# EAGLE board PCB_heatedbed_Mk2a_WITH_MOSFET (EAGLE 6.1)
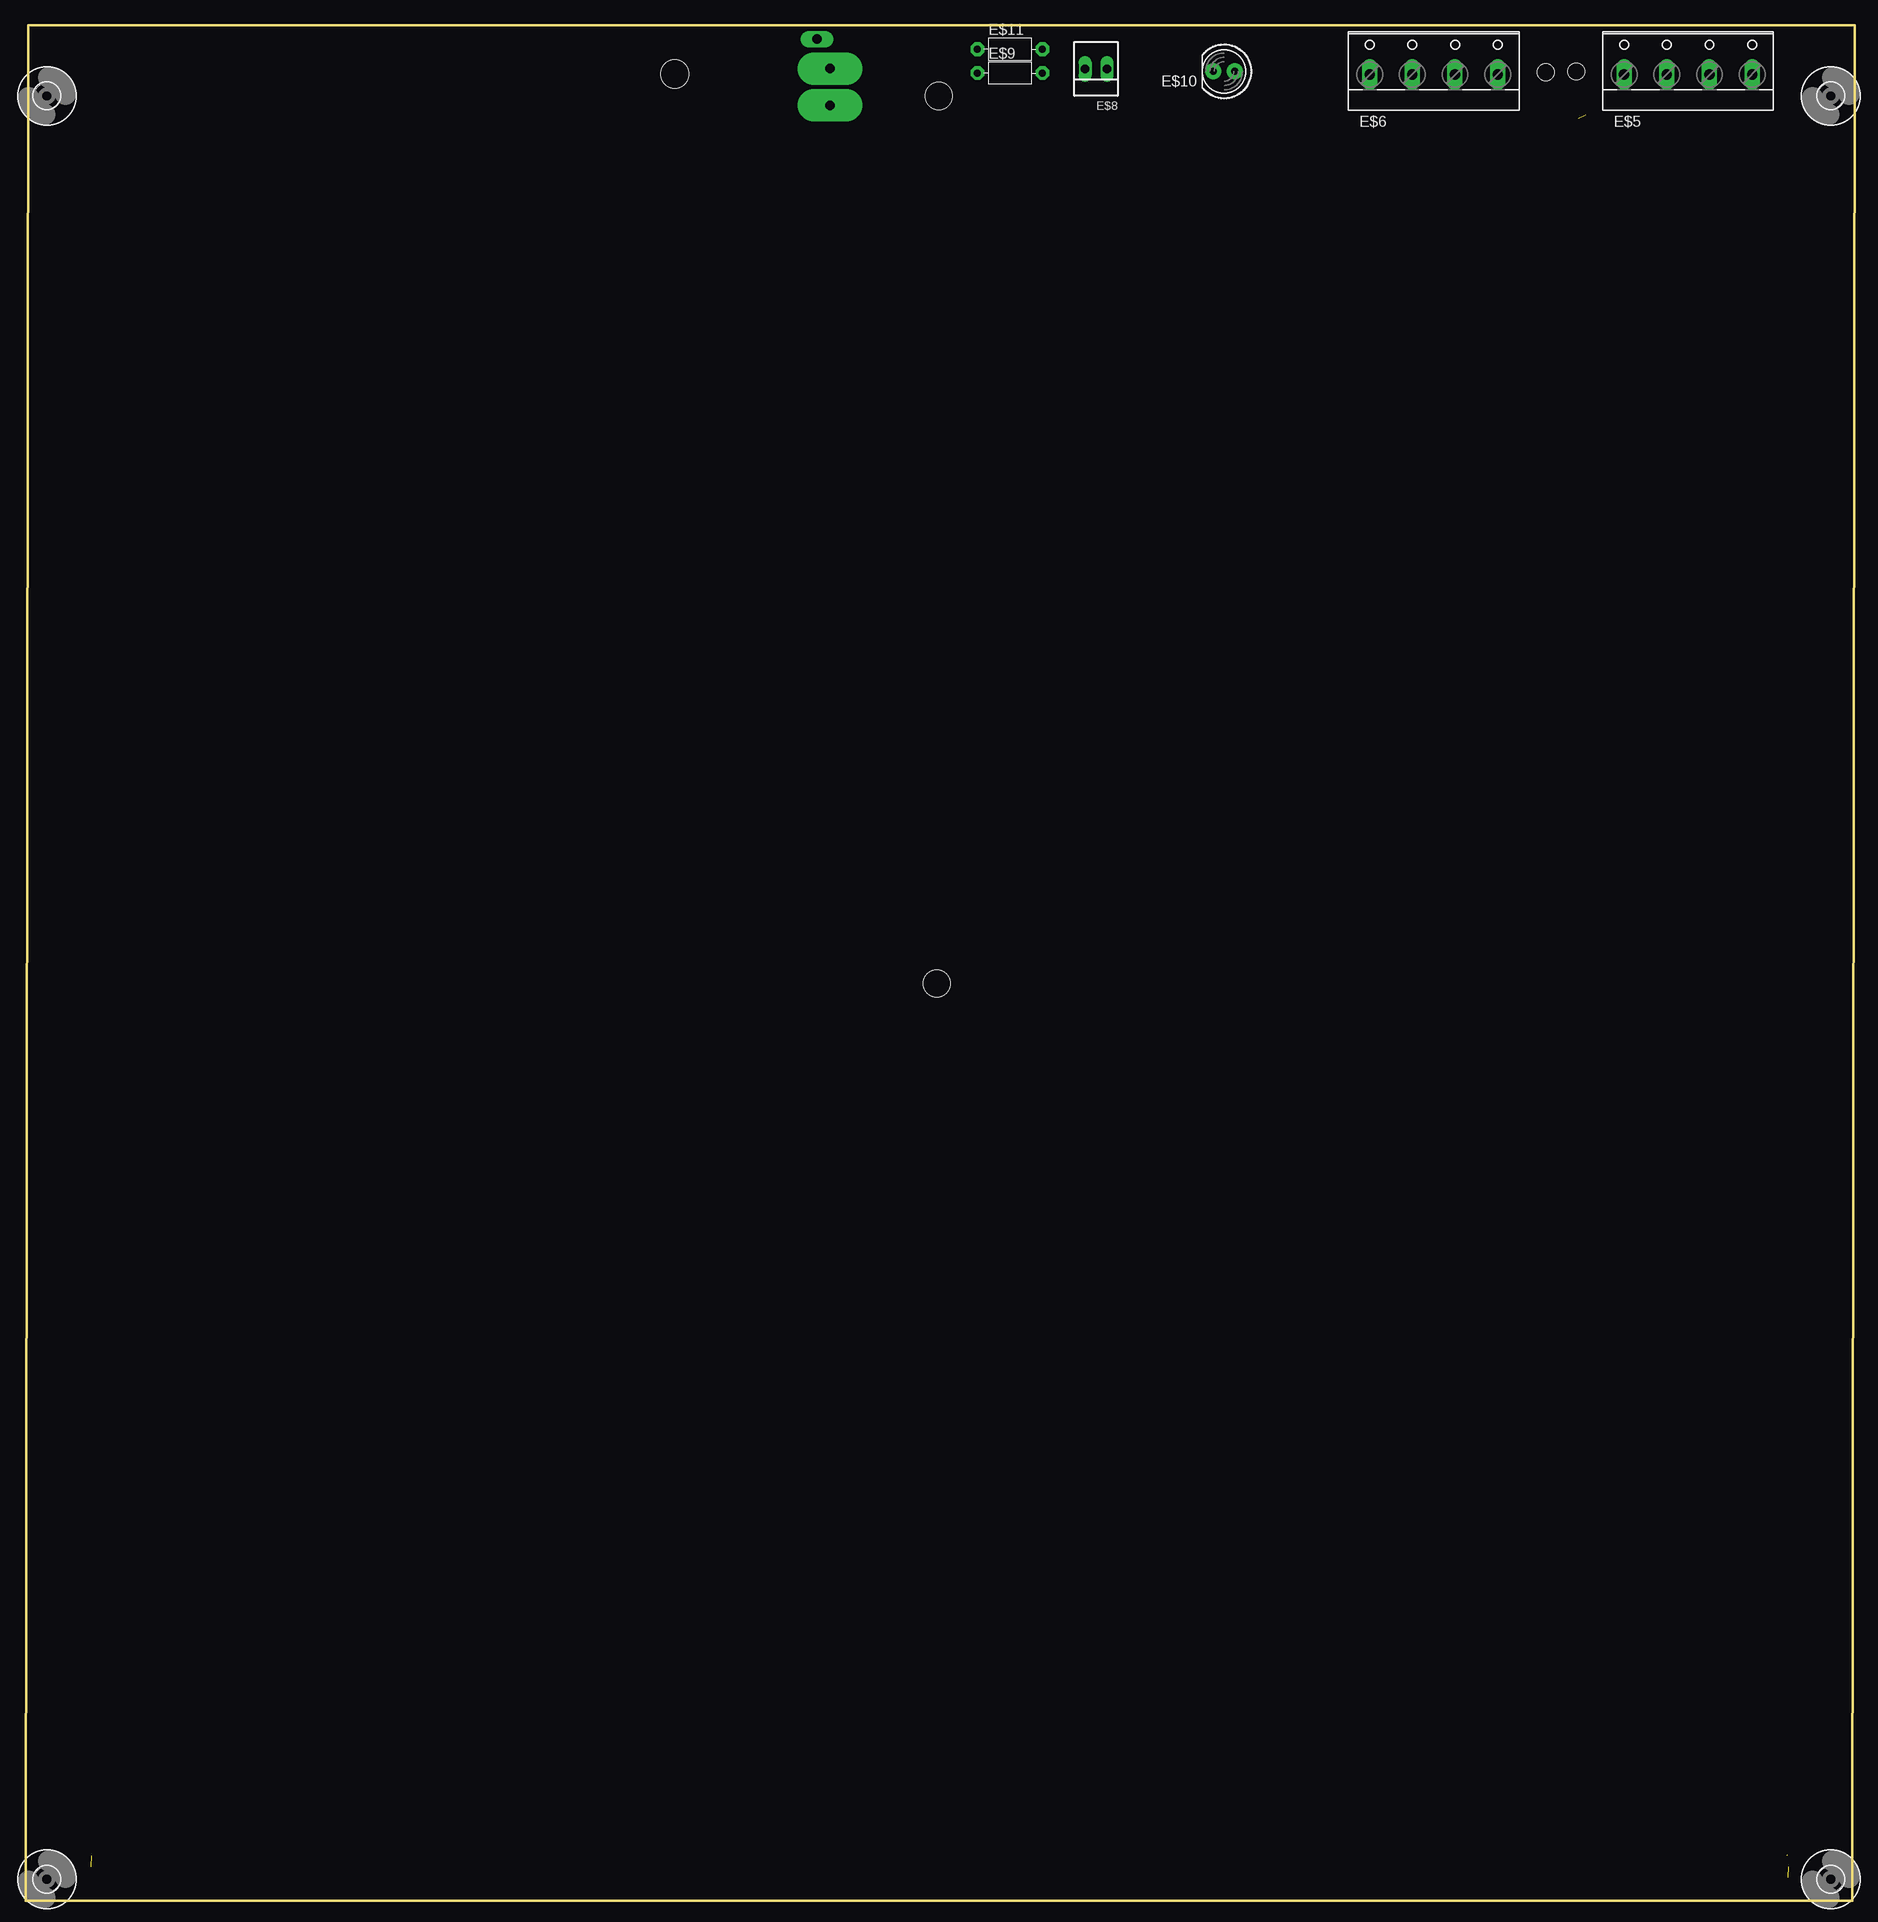
[diagram p0: board, top side]
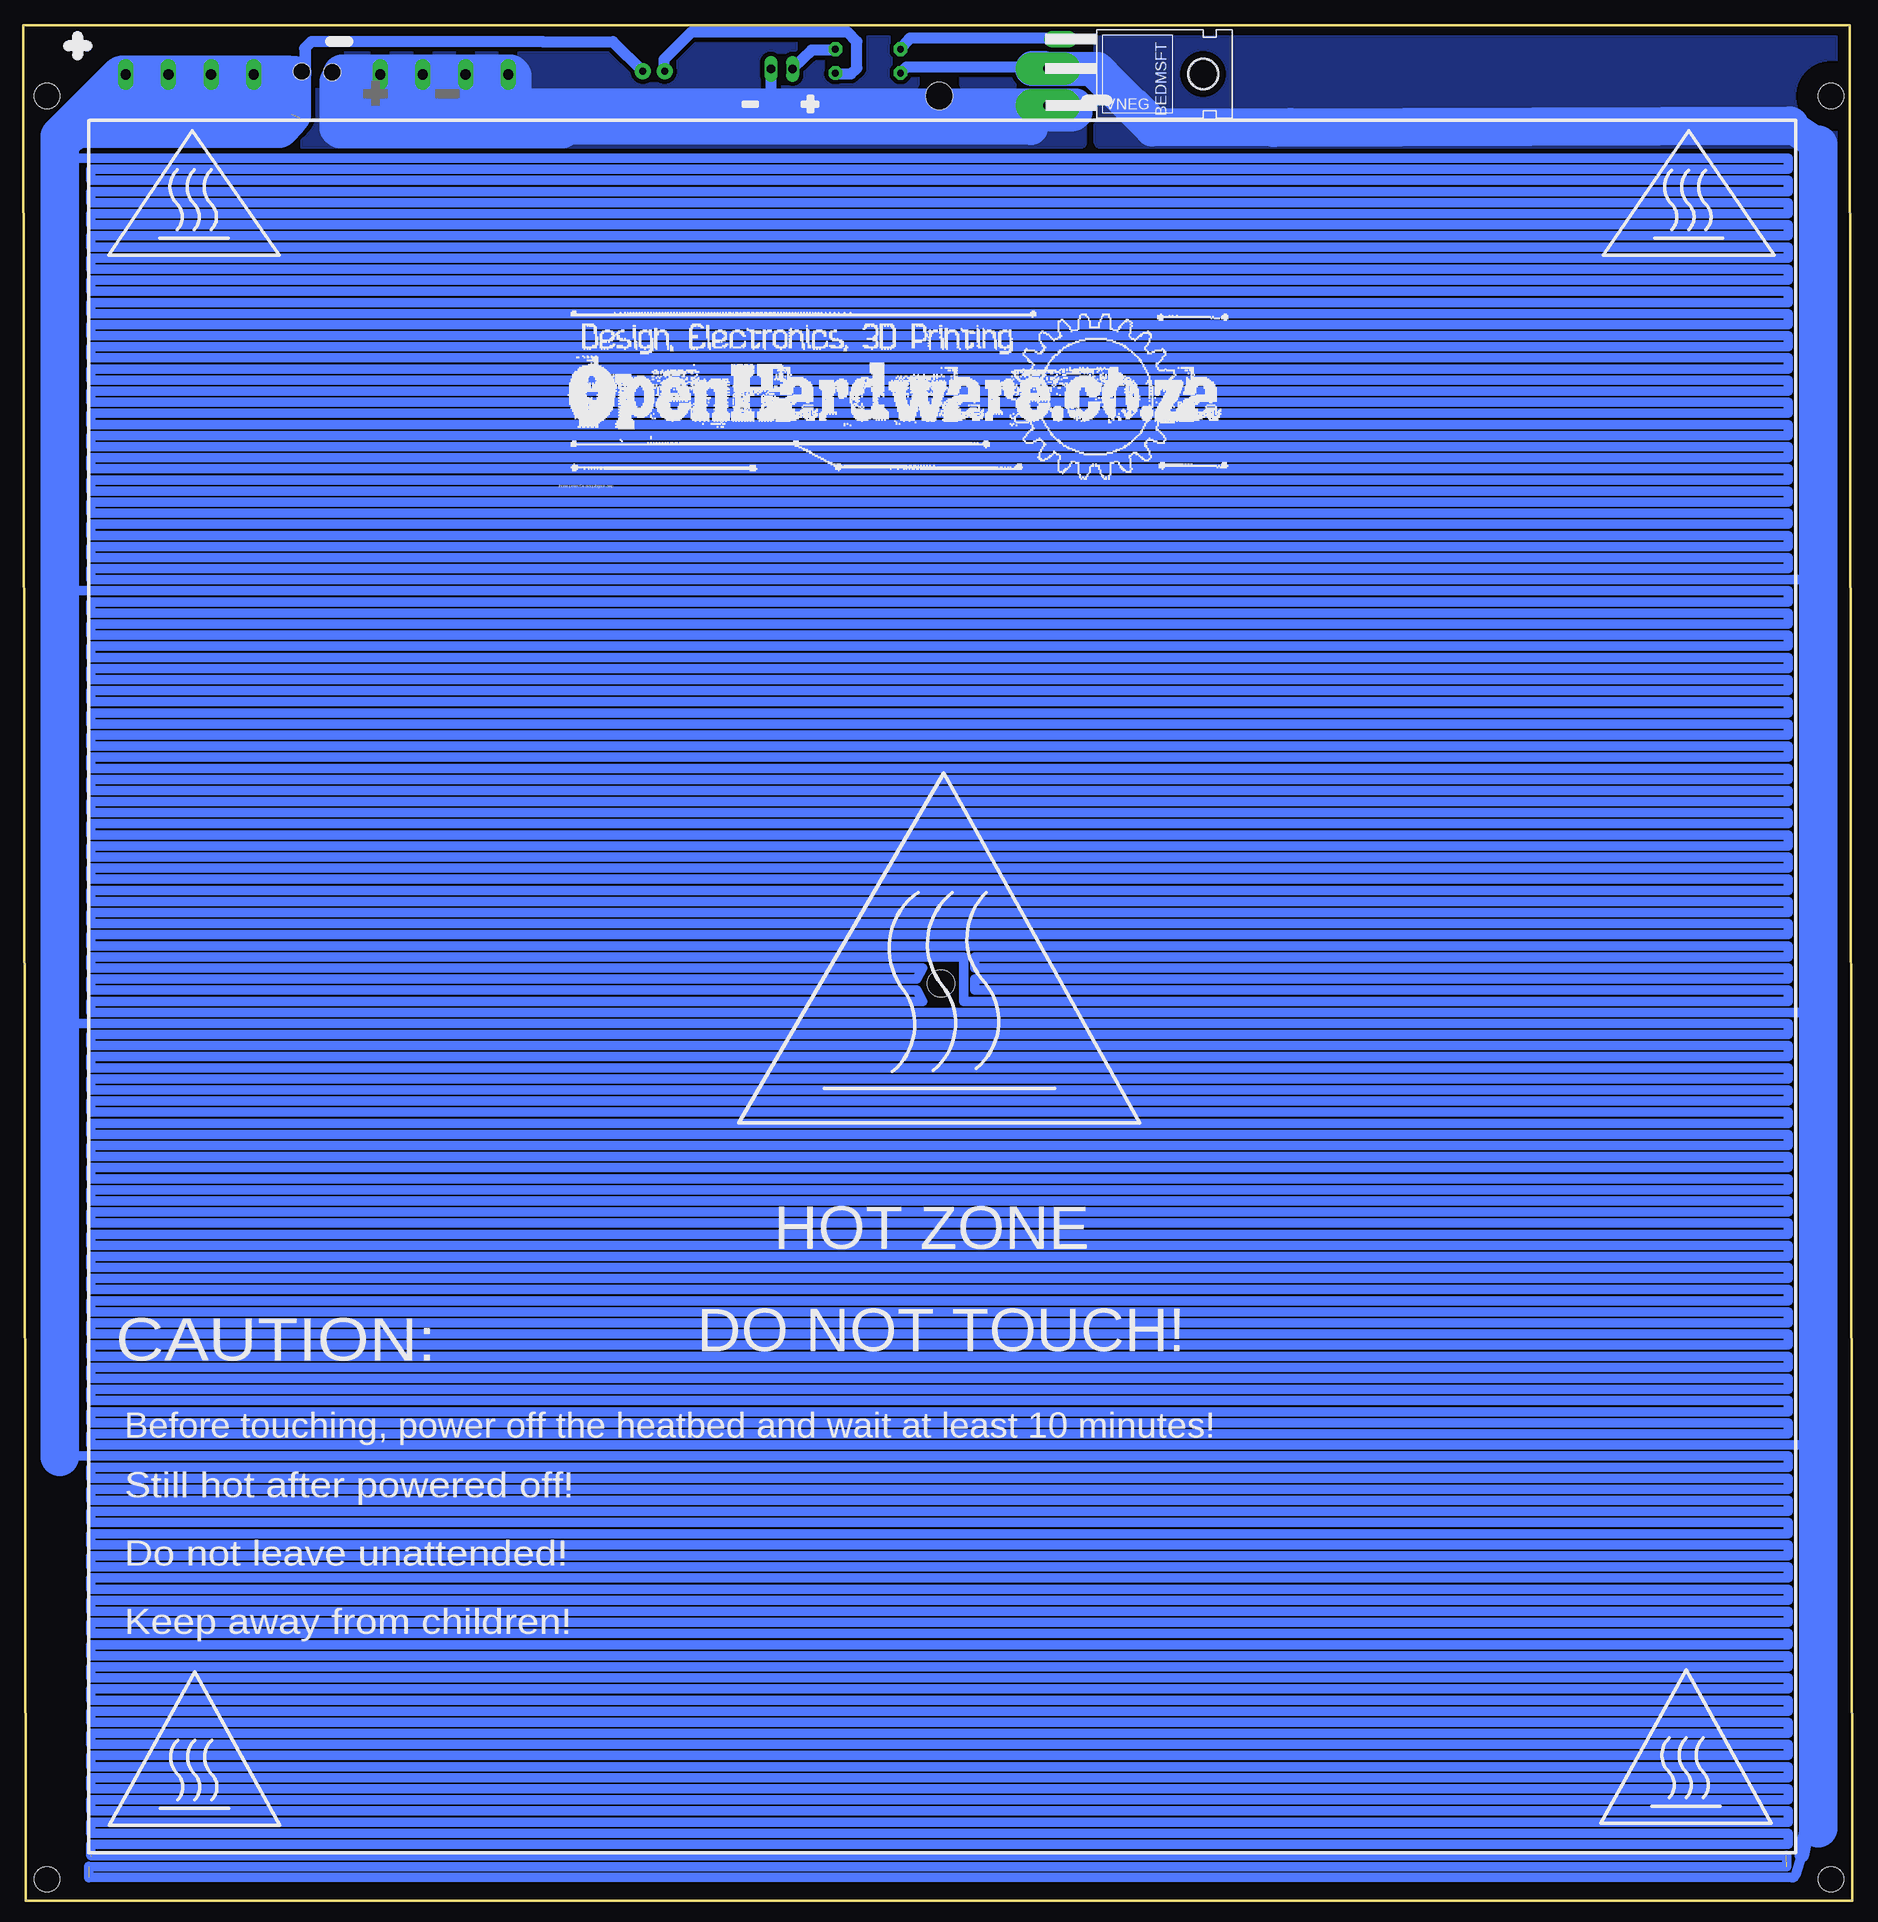
[diagram p1: board, bottom side, seen from below]

Size 214.3 x 219.8 mm. Coordinates in mm from the lower left corner, seen from the top.
Outline: 213.96,0.07 213.99,0.07
Outline: 214.3,219.8 0.3,219.8 0,0 214,0 214.3,219.8
Copper layers (1*16): Top 0.035mm / dielectric 1.5mm / Bottom 0.035mm
Design rules: minimum track width 10mil, minimum drill 24mil, track to track 20mil, track to pad 20mil, pad to pad 20mil, via to via 20mil, smd to smd 20mil, copper to edge 40mil, drill to drill 8mil, minimum pad ring 10mil, minimum via ring 8mil, stop-mask expansion 4mil, vias tented up to drill 0mil, thermal gap 10mil
Holes 3.2 mm at 106.97,211.5 106.77,107.5
Holes 2 mm at 181.68,214.37 178.11,214.27

## Footprints (pad centres in the part's own frame; a part is rotated, then mirrored left to right if it is on the bottom)
3,0 = hole 3: 0,0
W237-4 = drill 1.194 long: 1 -7.5,-1.27; 2 -2.5,-1.27; 3 2.5,-1.27; 4 7.5,-1.27
TO220CLH = drill 1.118 pad 3.81 long: A -0.635,-7.017; G 3.683,-7.017 | drill 1.118 pad 1.93 long: C -4.096,-5.524 | hole 3.302: 0,11.176
22-23-2021 = drill 1 long: 1 -1.27,0; 2 1.27,0
R-7,5 = drill 0.813 pad 1.6 octagon: 1 -3.81,0; 2 3.81,0
LED5MM = drill 0.813 pad 1.88: A -1.27,0; K 1.27,0

## Placement (x,y rotation side)
E$1  [3,0]  2.5,211.5 180 top
E$2  [3,0]  211.5,211.5 180 top
E$3  [3,0]  211.5,2.5 180 top
E$4  [3,0]  2.5,2.5 180 top
E$5  [W237-4]  194.79,215.29 0 top
E$6  [W237-4]  164.98,215.29 0 top
E$7  [TO220CLH]  87.22,214.08 270 bottom
E$8  [22-23-2021]  125.42,214.68 180 top
E$9  [R-7,5]  115.32,214.18 0 top
E$10  [LED5MM]  140.42,214.38 180 top
E$11  [R-7,5]  115.32,216.98 0 top

## Library data of the parts
E$1-E$4 = holes
E$5 E$6 = con-wago-500
E$7 = triac_OPENHW
E$8 = con-molex
E$9 E$11 = discrete
E$10 = SparkFun-LED

## Tracks (layer width: path | path; a pad name or v marks a point on that pad's centre or on a via)
12V  (1 unrouted)
  Bottom 1.27: 181.92,208.88 181.92,210.58 181.22,211.28 181.22,217.18 180.62,217.78 | 153.42,217.88 153.52,217.88 | 153.52,217.88 180.52,217.88 180.62,217.78 | 180.62,217.78 181.32,217.08 | 180.62,217.78 181.32,217.08 | 181.32,217.08 181.32,211.68 181.72,211.28 | 153.52,217.88 145.22,217.88 141.72,214.38
  Bottom 4.5: 204.72,208.38 205.22,208.38 205.92,207.68 202.22,207.68 | 202.22,207.68 184.42,207.68 | 184.42,207.68 184.32,207.68 183.22,208.78 183.22,211.98 183.32,211.98 184.42,210.88 201.02,210.88 201.42,210.48 201.42,208.48 202.22,207.68 | 202.22,207.68 208.32,207.68 210.02,205.98 210.02,206.78 202.92,213.88 182.92,213.88 182.82,213.78 182.82,209.28 184.42,207.68
GND
  Bottom 4: 91.12,210.38 93.72,210.38 | 93.72,210.38 96.12,210.38 96.22,210.28 96.22,209.58 | 96.22,209.58 96.22,209.48 96.12,209.38 91.22,209.38 91.02,209.58 91.02,210.38 93.72,210.38 | 93.72,210.38 94.12,210.38 94.52,209.98 95.82,209.98 96.22,209.58 | 96.22,209.58 96.22,207.78 176.22,207.78 177.62,207.68 | 92.32,210.18 93.52,210.18 93.72,210.38 | 93.72,210.38 156.32,210.38 157.32,211.38
  Bottom 4.5: 151.22,207.58 158.32,207.58 159.12,208.38 159.12,213.48 159.72,214.08 176.42,214.08 | 176.42,214.08 176.92,214.08 176.92,207.88 177.12,207.68 151.32,207.68 151.22,207.58 | 151.22,207.58 177.12,207.58 177.32,207.78 177.32,213.18 176.42,214.08 | 176.42,214.08 157.22,214.08 157.02,213.88 157.02,210.68 155.42,209.08 141.62,209.08 140.82,208.28 159.32,208.28 161.42,210.38 173.52,210.38 173.82,210.08
  pour Bottom: 90.32,205.98 211.62,205.98 211.62,219.08 90.32,219.08
S$1
  Bottom 4: 182.52,214.18 202.82,214.18 202.92,214.18
S$3
  Bottom 1.1: 207.7,204.2 7.5,204.2 7.5,202.9 206.4,202.9 206.4,201.6 7.5,201.6 7.5,200.3 206.4,200.3 206.4,199 7.5,199 7.5,197.7 206.4,197.7 206.4,196.4 7.5,196.4 7.5,195.1 206.4,195.1 206.4,193.8 7.5,193.8 7.5,192.5 206.4,192.5 206.4,191.2 7.5,191.2 7.5,189.9 206.4,189.9 206.4,188.6 7.5,188.6 7.5,187.3 206.4,187.3 206.4,186 7.5,186 7.5,184.7 206.4,184.7 206.4,183.4 7.5,183.4 7.5,182.1 206.4,182.1 206.4,180.8 7.5,180.8 7.5,179.5 206.4,179.5 206.4,178.2 7.5,178.2 7.5,176.9 206.4,176.9 206.4,175.6 7.5,175.6 7.5,174.3 206.4,174.3 206.4,173 7.5,173 7.5,171.7 206.4,171.7 206.4,170.4 7.5,170.4 7.5,169.1 206.4,169.1 206.4,167.8 7.5,167.8 7.5,166.5 206.4,166.5 206.4,165.2 7.5,165.2 7.5,163.9 206.4,163.9 206.4,162.6 7.5,162.6 7.5,161.3 206.4,161.3 206.4,160 7.5,160 7.5,158.7 206.4,158.7 206.4,157.4 7.5,157.4 7.5,156.1 206.4,156.1 206.4,154.8 6.2,154.8
S$4
  Bottom 1.1: 7.5,111.9 206.4,111.9 206.4,113.2 7.5,113.2 7.5,114.5 206.4,114.5 206.4,115.8 7.5,115.8 7.5,117.1 206.4,117.1 206.4,118.4 7.5,118.4 7.5,119.7 206.4,119.7 206.4,121 7.5,121 7.5,122.3 206.4,122.3 206.4,123.6 7.5,123.6 7.5,124.9 206.4,124.9 206.4,126.2 7.5,126.2 7.5,127.5 206.4,127.5 206.4,128.8 7.5,128.8 7.5,130.1 206.4,130.1 206.4,131.4 7.5,131.4 7.5,132.7 206.4,132.7 206.4,134 7.5,134 7.5,135.3 206.4,135.3 206.4,136.6 7.5,136.6 7.5,137.9 206.4,137.9 206.4,139.2 7.5,139.2 7.5,140.5 206.4,140.5 206.4,141.8 7.5,141.8 7.5,143.1 206.4,143.1 206.4,144.4 7.5,144.4 7.5,145.7 206.4,145.7 206.4,147 7.5,147 7.5,148.3 206.4,148.3 206.4,149.6 7.5,149.6 7.5,150.9 206.4,150.9 206.4,152.2 7.5,152.2 7.5,153.5 207.7,153.5
S$5
  Bottom 1.1: 207.7,102.8 7.5,102.8 7.5,101.5 206.4,101.5 206.4,100.2 7.5,100.2 7.5,98.9 206.4,98.9 206.4,97.6 7.5,97.6 7.5,96.3 206.4,96.3 206.4,95 7.5,95 7.5,93.7 206.4,93.7 206.4,92.4 7.5,92.4 7.5,91.1 206.4,91.1 206.4,89.8 7.5,89.8 7.5,88.5 206.4,88.5 206.4,87.2 7.5,87.2 7.5,85.9 206.4,85.9 206.4,84.6 7.5,84.6 7.5,83.3 206.4,83.3 206.4,82 7.5,82 7.5,80.7 206.4,80.7 206.4,79.4 7.5,79.4 7.5,78.1 206.4,78.1 206.4,76.8 7.5,76.8 7.5,75.5 206.4,75.5 206.4,74.2 7.5,74.2 7.5,72.9 206.4,72.9 206.4,71.6 7.5,71.6 7.5,70.3 206.4,70.3 206.4,69 7.5,69 7.5,67.7 206.4,67.7 206.4,66.4 7.5,66.4 7.5,65.1 206.4,65.1 206.4,63.8 7.5,63.8 7.5,62.5 206.4,62.5 206.4,61.2 7.5,61.2 7.5,59.9 206.4,59.9 206.4,58.6 7.5,58.6 7.5,57.3 206.4,57.3 206.4,56 7.5,56 7.5,54.7 206.4,54.7 206.4,53.4 6.2,53.4
S$6  (3 unrouted)
  Bottom 1.1: 206.4,5.3 206.4,6.6 7.5,6.6 7.5,7.9 206.4,7.9 206.4,9.2 7.5,9.2 7.5,10.5 206.4,10.5 206.4,11.8 7.5,11.8 7.5,13.1 206.4,13.1 206.4,14.4 7.5,14.4 7.5,15.7 206.4,15.7 206.4,17 7.5,17 7.5,18.3 206.4,18.3 206.4,19.6 7.5,19.6 7.5,20.9 206.4,20.9 206.4,22.2 7.5,22.2 7.5,23.5 206.4,23.5 206.4,24.8 7.5,24.8 7.5,26.1 206.4,26.1 206.4,27.4 7.5,27.4 7.5,28.7 206.4,28.7 206.4,30 7.5,30 7.5,31.3 206.4,31.3 206.4,32.6 7.5,32.6 7.5,33.9 206.4,33.9 206.4,35.2 7.5,35.2 7.5,36.5 206.4,36.5 206.4,37.8 7.5,37.8 7.5,39.1 206.4,39.1 206.4,40.4 7.5,40.4 7.5,41.7 206.4,41.7 206.4,43 7.5,43 7.5,44.3 206.4,44.3 206.4,45.6 7.5,45.6 7.5,46.9 206.4,46.9 206.4,48.2 7.5,48.2 7.5,49.5 206.4,49.5 206.4,50.8 7.5,50.8 7.5,52.1 207.7,52.1 | 7.76,5.28 206.35,5.26 | 7.68,3.98 206.58,3.99 | 6.78,2.72 206.55,2.71
S$7
  Bottom 3.3: 210,205.5 206.6,207.9
  Bottom 4.5: 206.6,207.9 195.85,207.8 | 210,205.5 210,52
S$9
  Bottom 1.27: 94.32,214.88 110.82,214.88 111.52,214.18
S$11
  Bottom 1.27: 91.52,215.78 90.12,215.78 90.02,215.88
S$12
  Bottom 1.27: 126.72,214.78 126.72,211.58 126.62,211.48
S$15
  Bottom 4.5: 206.02,207.98 184.72,207.98 183.32,209.38 183.32,213.98 202.62,213.98 202.62,211.78 206.42,207.98
S$17
  Bottom 1.1: 206.4,105.4 206.4,104.1 6.2,104.1
S$19
  Bottom 1.27: 4.5,8 5,8.5 5,9
S$20
  Bottom 1.1: 206.4,105.4 108.9,105.4 109.6,106.7 206.4,106.7 206.4,108 109.6,108 108.9,109.3 206.4,109.3
S$21
  Bottom 1.1: 6.9,2.7 6.6,3 5.9,5.3
  Bottom 1.676: 5.2,8.9 5.9,5.3
S$22
  Bottom 1.1: 210.2,207 207.8,209
S$23
  Bottom 1.1: 210.2,207.2 208,208.8
S$24
  Bottom 1.1: 7.5,109.3 7.5,108
S$25
  Bottom 0.305: 7.05,2.25 arc90 7.15,2.35
S$26
  Bottom 1.1: 7.5,105.4 7.5,106.7
S$27
  Bottom 1.1: 7.5,108 102.8,108
S$28
  Bottom 1.1: 206.4,109.3 206.4,110.6 104.1,110.6
S$29
  Bottom 1.1: 104.1,105.4 102.7,105.4 8.9,105.4 7.5,105.4
S$30
  Bottom 1.1: 7.5,109.3 102.8,109.3
S$31
  Bottom 1.1: 7.5,110.6 102.8,110.6
S$32
  Bottom 1.1: 104.1,110.6 104.1,105.4
S$33
  Bottom 1.1: 102.8,106.7 101.4,106.7 8.9,106.7 7.5,106.7
S$34
  Bottom 1.1: 102.8,108 102.8,106.7
S$35
  Bottom 1.1: 102.8,110.6 102.8,109.3
S$36
  Bottom 1.1: 7.5,110.6 7.5,111.9
S$38
  Bottom 1.27: 145.42,209.88 145.32,209.78
S$46
  Bottom 1.1: 206.6,4 206.6,2.7
S$47
  Bottom 1.1: 7.7,4 7.7,5.3
SIGNAL
  Bottom 1.27: 119.32,216.88 121.92,216.88 124.12,214.78
SIGNALGATE
  Bottom 1.27: 92.62,218.28 110.42,218.28 111.52,216.98
SWITCHED
  Bottom 3.81: 7.3,208 4,205.8
  Bottom 4: 94.72,214.78 96.02,214.78 96.12,214.68 89.12,214.68 | 89.12,214.68 88.42,214.68 86.82,213.08 84.12,210.38 84.02,210.38 81.72,208.08 65.82,208.08 65.82,207.68 65.92,207.58 82.02,207.58 89.12,214.68
  Bottom 4.5: 4,205.8 4,8.5 | 67.8,207.8 7.3,208
  pour Bottom: 88.22,219.08 2.42,219.08 2.42,205.98 88.22,205.98
SWITCHEDRESISTOR
  Bottom 1.27: 119.32,214.08 117.32,214.08 116.62,214.78 116.62,217.88 117.72,218.98 136.02,218.98 139.22,215.78 139.22,214.28

## Text on the board
bPlace: /home/peter/Desktop/logooh.bmp | HOT ZONE | DO NOT TOUCH! | CAUTION: | Before touching, power off the heatbed and wait at least 10 minutes! | Still hot after powered off! | Do not leave unattended! | Keep away from children!